# Altium PCB MED_BOX_v0.2.PcbDoc
Units mm, origin at the board's own origin, x right, y up, seen from the top; angles counter-clockwise.
Board outline 74.27 x 27.94 mm, 2 copper layers (Top Layer, Bottom Layer); 54 components, 50 nets, 201 pads, 140 vias.
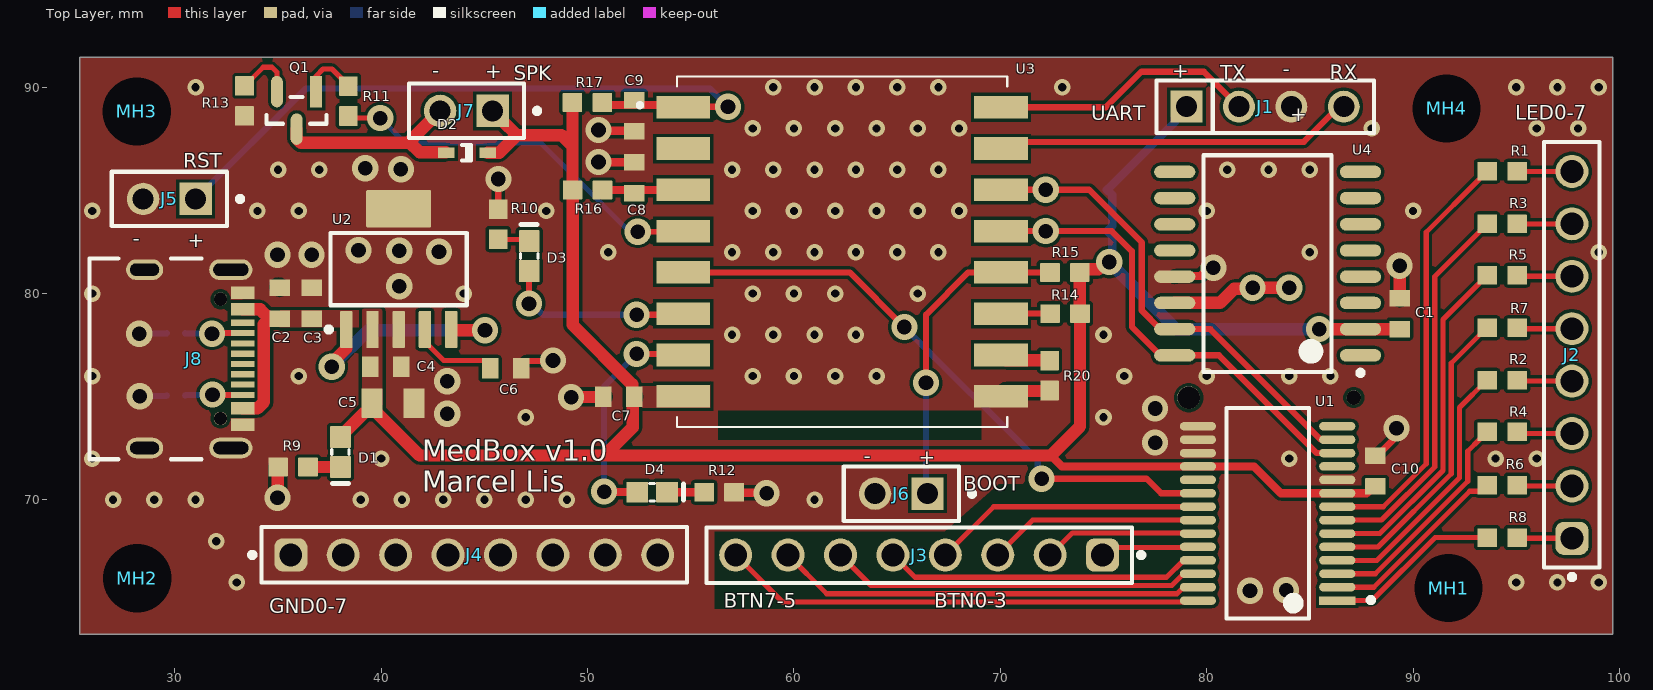
[diagram p0: Top Layer view]
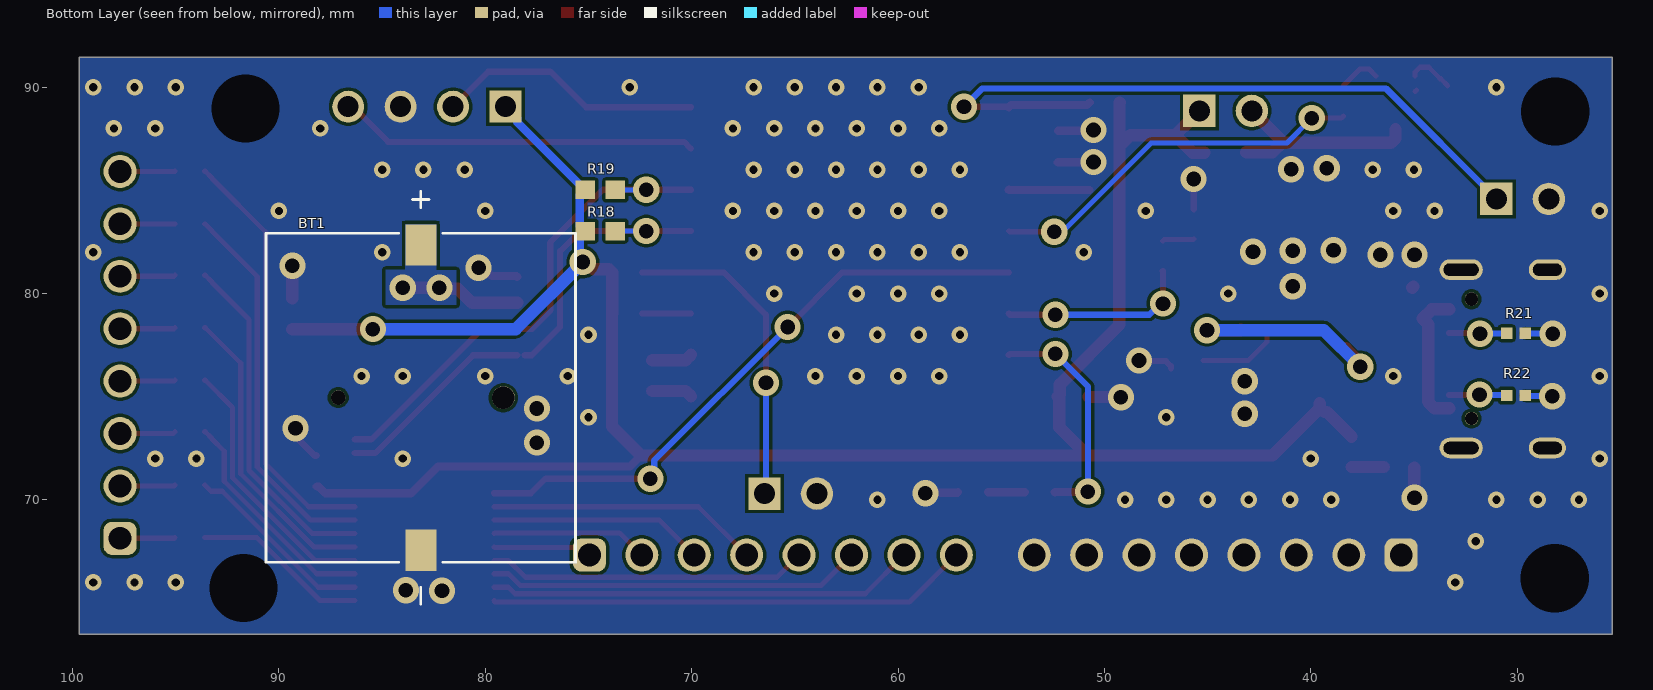
[diagram p1: Bottom Layer view, seen from below]
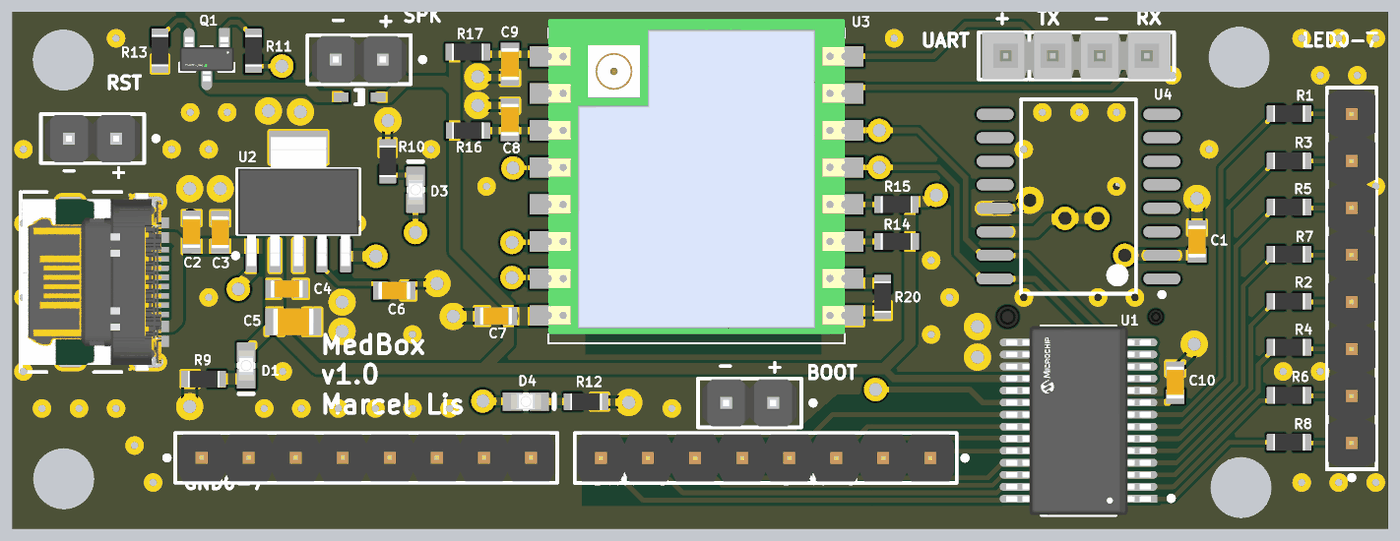
[diagram p2: 3D render of the assembled board from above, using the file's embedded part models]
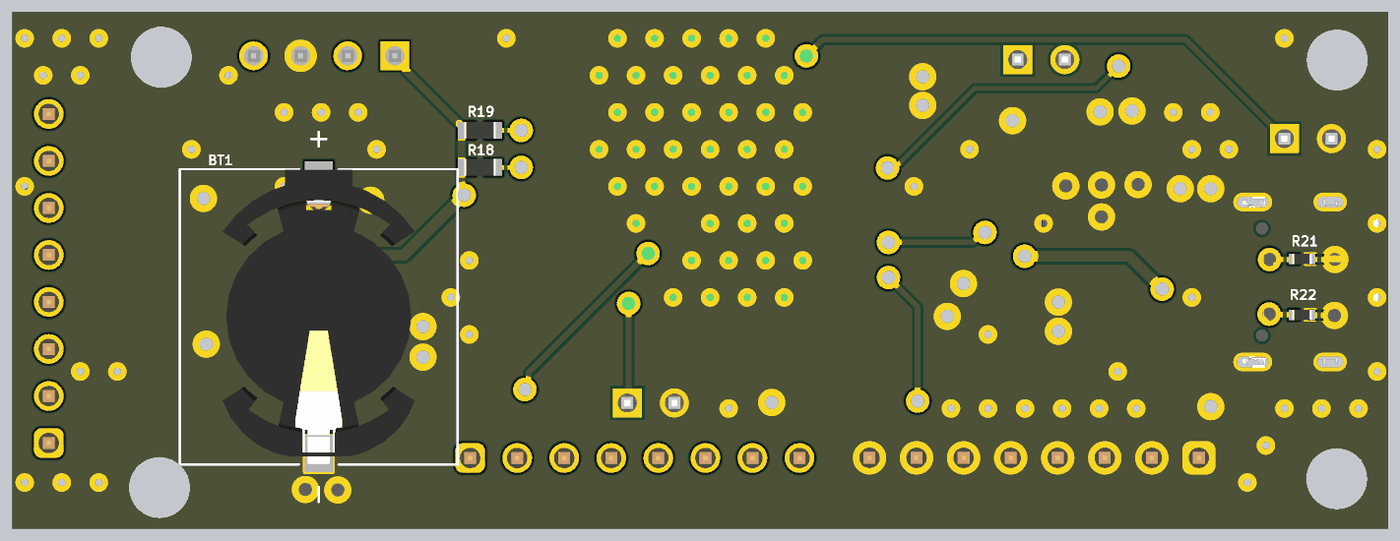
[diagram p3: 3D render of the assembled board from below, using the file's embedded part models]

## Layer stack, top to bottom
Top Solder: solder mask 0.0102, Solder Resist, Dk 3.5
Top Layer: signal copper 0.0356
Dielectric 1: dielectric 0.32, FR-4, Dk 4.8
Bottom Layer: signal copper 0.0356
Bottom Solder: solder mask 0.0102, Solder Resist, Dk 3.5

## Board outline
25.4,63.499 99.668,63.499 99.668,91.439 99.667,91.439 25.4,91.439

## Design rules (kind name [scope] priority, off if disabled: settings)
Clearance [All] p1: gap=0.15 ignorepadtopadclearanceinfootprint=FALSE
PlaneConnect [All] p1: planeconnectstyle=Direct reliefexpansion=0.508 reliefentries=4 reliefconductorwidth=0.254 reliefairgap=0.254
PolygonConnect [All] p1: connectstyle=Direct reliefconductorwidth=0.254 reliefentries=4 polygonreliefangle="90 Angle" airgapwidth=0.254
RoutingVias [All] p1: holewidth=0.3 width=0.6 viastyle="Through Hole" minholewidth=0.3 minwidth=0.6 maxholewidth=0.3 maxwidth=0.6
SolderMaskExpansion [All] p1: expansion=0.102 istentingtop=FALSE
SupplyNets "Schematic Supply Nets_1" [InNet('VCC')] p1: voltage=0.000
SupplyNets "Schematic Supply Nets_2" [InNet('GND')] p2: voltage=0.000
SupplyNets "Schematic Supply Nets" [InNet('+V_USB')] p3: voltage=0.000
Width [All] p1: maxlimit=0.8 minlimit=0.2 preferedwidth=0.25 minimp=50.000000 maximp=50.000000 favimp=50.000000
29 further rules are at their usual default settings.

## Classes and differential pairs
component class USB: J8 R21 R22
component class RTC: BT1 C10 U4
component class MED_BOX: J1 J2 J3 J4 MH1 MH2 MH3 MH4
component class Designator: C7 C8 C9 D2 D3 D4 J5 J6 J7 Q1 R10 R11 R12 R13 R14 R15 R16 R17 R18 R19 R20 U3

## Components (designator, comment, footprint, x,y, rotation, side; value= is the part's Value field where it differs from the comment)
BT1 "1072" BAT_1072 83.128,74.955 r270 bottom
C1 "100n" C0603 89.353,79.025 r270 top
C2 "1u" C0603 35.076,79.536 r270 top
C3 "100n" C0603 36.625,79.525 r270 top
C4 "100n" C0603 40.22,76.459 r180 top
C5 "10u" C0805 40.57,74.684 r180 top
C6 "10n" C0603 46.025,76.375 r180 top
C7 "100n" C0603 51.51,75 r0 top
C8 "100n" C0603 52.26,85.6 r270 top
C9 "100n" C0603 52.265,88.61 r90 top
C10 "100n" C0603 88.175,71.4 r270 top
D1 "LED" LED0603 38.025,72.32 r90 top
D2 "1N4148WT" FAIR-SOD-523F-2_V 44.15,86.825 r180 top
D3 "LED" LED0603 47.169,81.817 r270 top
D4 "LED" LED0603 53.125,70.375 r180 top
J1 "GoldPin 4x1" SMTC-TSW-104-08-X-S 79.024,89.055 r0 top
J2 "61300811121" 61300811121 97.7,77.025 r90 top
J3 "61300811121" 61300811121 66.065,67.325 r180 top
J4 "61300811121" 61300811121 44.507,67.333 r0 top
J5 "M20-9990246" FP-M20-9990246-MFG 29.731,84.583 r180 top
J6 "M20-9990246" FP-M20-9990246-MFG 65.2,70.3 r180 top
J7 "M20-9990246" FP-M20-9990246-MFG 44.125,88.85 r180 top
J8 "USB4105-GF-A" FP-USB4105-GF-A-MFG 29.695,76.834 r270 top
MH1 "M3 Mounting Hole" "Copy of M4 Mounting Hole" 91.725,65.725 r0 top
MH2 "M3 Mounting Hole" "Copy of M4 Mounting Hole" 28.175,66.2 r0 top
MH3 "M3 Mounting Hole" "Copy of M4 Mounting Hole" 28.15,88.825 r0 top
MH4 "M3 Mounting Hole" "Copy of M4 Mounting Hole" 91.625,88.975 r0 top
Q1 "BSS138" FP-318-08-IPC_B 35.895,88.875 r270 top
R1 "330R" R0603 94.318,85.928 r0 top
R2 "330R" R0603 94.318,75.793 r0 top
R3 "330R" R0603 94.318,83.372 r0 top
R4 "330R" R0603 94.318,73.301 r0 top
R5 "330R" R0603 94.318,80.887 r0 top
R6 "330R" R0603 94.318,70.716 r0 top
R7 "330R" R0603 94.318,78.344 r0 top
R8 "330R" R0603 94.318,68.174 r0 top
R9 "1k" R0603 35.725,71.595 r0 top
R10 "1k" R0603 45.665,83.361 r90 top
R11 "1k" R0603 38.408,89.326 r270 top
R12 "1k" R0603 56.37,70.371 r0 top
R13 "10k" R0603 33.371,89.335 r90 top
R14 "10k" R0603 73.135,79.025 r0 top
R15 "10k" R0603 73.13,81.02 r0 top
R16 "10k" R0603 49.997,85.016 r180 top
R17 "10k" R0603 49.989,89.256 r180 top
R18 "4k7" R0603 74.425,83.025 r0 bottom
R19 "4k7" R0603 74.425,85.025 r0 bottom
R20 "10k" R0603 72.385,76.025 r90 top
R21 "5k1" R0402 30.05,78.075 r180 bottom
R22 "5k1" R0402 30.05,75.056 r180 bottom
U1 "MCP23017T-E/SS" FP-C04-073-IPC_C 82.953,69.344 r180 top
U2 "TPS73718DCQR" DCQ0006A_L 40.845,81.184 r90 top
U3 "ESP8266_ESP-07" ESP8266ESP07 62.335,82.025 r0 top
U4 "DS3231SN#" W16#H2_L 82.953,81.45 r180 top

## Footprints (in the part's own frame and the unit in brackets; to place one, negate y for a bottom-side part, rotate by r counter-clockwise, add the part's x,y. Pads: shape width x height; smd on the part's side, far side on the other; paste and mask are expansions set on the pad)
61300811121 [mm] "Pin Header, pitch 2.54 mm, THT, Vertical, single row, 8p"
  rrect50% 1.6x1.6 hole 1.1: 1(-8.89,0)
  round 1.6 hole 1.1: 2(-6.35,0) 3(-3.81,0) 4(-1.27,0) 5(1.27,0) 6(3.81,0) 7(6.35,0) 8(8.89,0)
  silkscreen extent -10.88,-1.35 10.31,1.35, body extent -10.16,-1.27 10.16,1.27, height 8.57
BAT_1072 [mm]
  rect 2x1.5 smd: N(7.4,0) P(-7.4,0)
  round 0.7 hole 0.7 unplated: ""(0,-4)
  round 1.1 hole 1.1 unplated: ""(0,4)
  silkscreen extent -10,-7.5 10,7.5, body extent -7.95,-5.2 7.95,5.2, height 3.75
C0603 [mm] "Generic 0603 SMD Ceramic Capacitor Footprint"
  rrect5% 0.8x1 smd: 1(-0.75,0) 2(0.75,0)
  body extent -0.87,-0.48 0.87,0.48, height 0.95
C0805 [mm] "Generic 0805 SMD Ceramic Capacitor Footprint"
  rrect5% 1x1.45 smd: 1(-1.016,0) 2(1.016,0)
  body extent -1.1,-0.72 1.1,0.72, height 1.45
"Copy of M4 Mounting Hole" [mm]
  round 0 hole 3.3 unplated mask+0.051: 1(0,0)
DCQ0006A_L [mm] "SOT223, 6-Leads, Body 6.55x3.55mm, Pitch 1.27mm, IPC High Density"
  rrect17% 1.8x0.6 smd: 1(-2.925,2.54) 2(-2.925,1.27) 3(-2.925,0) 4(-2.925,-1.27) 5(-2.925,-2.54)
  rrect6% 1.8x3.15 smd: 6(2.925,0)
  silkscreen extent -3.05,-3.3 1.75,3.51, body extent -3.48,-3.25 3.48,3.25, height 1.64
ESP8266ESP07 [mm]
  rect 2.6x1.1 smd: 1(-7.7,7) 2(-7.7,5) 3(-7.7,3) 4(-7.7,1) 5(-7.7,-1) 6(-7.7,-3) 7(-7.7,-5) 8(-7.7,-7) 9(7.7,-7) 10(7.7,-5) 11(7.7,-3) 12(7.7,-1) 13(7.7,1) 14(7.7,3) 15(7.7,5) 16(7.7,7)
  silkscreen extent -9.9,-8.5 8,8.5, body extent -8,-8 8,9, height 2.21
FAIR-SOD-523F-2_V [mm] "SMD, 2-Leads, Body 1.2x0.8mm, Height 0.7mm"
  rect 0.8x0.5 smd: 1(-1,0) 2(1,0)
  silkscreen extent -0.2,-0.38 0.24,0.38, body extent -0.6,-0.4 0.6,0.4, height 0.71
FP-318-08-IPC_B [mm]
  rect 1.524x0.578 smd paste+0 mask+0: 1(-0.91,0.95)
  rrect100% 1.524x0.578 smd paste+0 mask+0: 2(-0.91,-0.95) 3(0.91,0)
  silkscreen extent -0.65,-1.45 0.65,1.45, body extent -1.92,-1.7 1.92,1.7, height 0.25
FP-C04-073-IPC_C [mm]
  rect 1.753x0.415 smd paste+0 mask+0: 1(-3.375,4.225)
  rrect100% 1.753x0.415 smd paste+0 mask+0: 2(-3.375,3.575) 3(-3.375,2.925) 4(-3.375,2.275) 5(-3.375,1.625) 6(-3.375,0.975) 7(-3.375,0.325) 8(-3.375,-0.325) 9(-3.375,-0.975) 10(-3.375,-1.625) 11(-3.375,-2.275) 12(-3.375,-2.925) 13(-3.375,-3.575) 14(-3.375,-4.225) 15(3.375,-4.225) 16(3.375,-3.575) 17(3.375,-2.925) 18(3.375,-2.275) 19(3.375,-1.625) 20(3.375,-0.975) 21(3.375,-0.325) 22(3.375,0.325) 23(3.375,0.975) 24(3.375,1.625) 25(3.375,2.275) 26(3.375,2.925) 27(3.375,3.575) 28(3.375,4.225)
  silkscreen extent -5.13,-5.1 2,5.1, body extent -4.35,-5.2 4.35,5.2, height 0.25
FP-M20-9990246-MFG [mm]
  rect 1.57x1.57 hole 1.02 paste-2539.97 mask+0: 1(-1.27,0)
  round 1.57 hole 1.02 paste-2539.97 mask+0: 2(1.27,0)
  silkscreen extent -3.55,-1.32 2.79,1.32, body extent -2.89,-1.42 2.89,1.42, height 0.25
FP-USB4105-GF-A-MFG [mm]
  rrect100% 1x2.1 hole 1.7 slot 0.6 at 0 deg paste-2539.97 mask+0: 1(-4.32,3.015) 2(4.32,3.015)
  rrect100% 1x1.8 hole 1.4 slot 0.6 at 0 deg paste-2539.97 mask+0: 3(-4.32,-1.165) 4(4.32,-1.165)
  rect 0.6x1.15 smd paste+0 mask+0: A1-B12(-3.2,3.59) A4-B9(-2.4,3.59) B1-A12(3.2,3.59) B4-A9(2.4,3.59)
  rect 0.3x1.15 smd paste+0 mask+0: A5(-1.25,3.59) A6(-0.25,3.59) A7(0.25,3.59) A8(1.25,3.59) B5(1.75,3.59) B6(0.75,3.59) B7(-0.75,3.59) B8(-1.75,3.59)
  round 0.65 hole 0.65 unplated paste-2539.97 mask+0: ""(-2.89,2.515) ""(2.89,2.515)
  silkscreen extent -4.86,-3.84 4.86,1.59, body extent -4.96,-3.94 4.96,4.27, height 0.25
LED0603 [mm] "0603 LED footprint"
  rrect5% 1.05x1 smd: A(0.725,0) K(-0.725,0)
  silkscreen extent -1.52,-0.42 0.11,0.43, body extent -0.81,-0.41 0.81,0.41, height 0.95
R0402 [mm] "Generic 0402 Resistor Footprint"
  rrect5% 0.55x0.55 smd: 1(-0.45,0) 2(0.45,0)
  body extent -0.53,-0.28 0.53,0.28, height 0.37
R0603 [mm] "Generic 0603 Resistor Footprint"
  rrect5% 0.95x0.9 smd: 1(-0.725,0) 2(0.725,0)
  body extent -0.85,-0.45 0.85,0.45, height 0.55
SMTC-TSW-104-08-X-S [mm] ".025 SQ Post Terminal Strip Assembly, 1x4 Pins, Vertical, 2.54mm Pitch, Male"
  rect 1.55x1.55 hole 1.02: 1(0,0)
  round 1.55 hole 1.02: 2(2.54,0) 3(5.08,0) 4(7.62,0)
  silkscreen extent -1.46,-1.27 9.08,1.27, body extent -1.27,-1.27 8.89,1.27, height 8.38
W16#H2_L [mm] "SOIC, 16-Leads, Body 10.3x7.5mm, Pitch 1.27mm, IPC High Density"
  oval 2x0.6 smd: 1(-4.5,4.445) 2(-4.5,3.175) 3(-4.5,1.905) 4(-4.5,0.635) 5(-4.5,-0.635) 6(-4.5,-1.905) 7(-4.5,-3.175) 8(-4.5,-4.445) 9(4.5,-4.445) 10(4.5,-3.175) 11(4.5,-1.905) 12(4.5,-0.635) 13(4.5,0.635) 14(4.5,1.905) 15(4.5,3.175) 16(4.5,4.445)
  silkscreen extent -4.62,-5.25 3.1,5.42, body extent -3.8,-5.25 3.8,5.25, height 2.65

## Part data
BT1: "Battery Holder CR1220/1225", Package="NON STANDARD-2 Keystone", Check_prices=https://www.snapeda.com/parts/1072/Keystone/view-part/?ref=eda, MF="Keystone Electronics", MP=1072, SnapEDA_Link=https://www.snapeda.com/parts/1072/Keystone/view-part/?ref=snap
C1 C2 C3 C4 C6 C7 C8 C9 C10: library part CMP-00024-8, "Generic 0603 SMD Ceramic Capacitor"
C5: library part CMP-00025-5, "Generic 0805 SMD Ceramic Capacitor"
D1 D3 D4: library part CMP-00036-7, "0603 LED"
D2: library part CMP-0881-00001-1, "High Conductance Fast Switching Diode, 75 V, -55 to 150 degC, 2-Pin SOD523F, RoHS", Manufacturer="Fairchild Semiconductor", Temperature Range="-55 to 150 degC", BVR (IR="5 uA)=75 V Min.", CO="4 pF Max.", ComponentLink1Description="Manufacturer URL", ComponentLink1URL=http://www.fairchildsemi.com/, ComponentLink2Description=Datasheet, ComponentLink2URL=http://www.fairchildsemi.com/ds/1N/1N4148WT.pdf, DatasheetVersion="Rev. A2", IR (VR="75 V)=5 uA Max.", Mounting Technology="Surface Mount", PackageDescription="2-Pin Surface Mount Device, Body 1.2 x 0.8 mm, Height 0.7 mm", PackageReference=SOD-523F-2, PartNumber=1N4148WT, RoHS=TRUE, VF="1 V Max."
J1: library part CMP-00067-4, "TSW - Samtec 2.54mm Pin Header 13.46mm Overall Pin Length 5.08mm Tail (08) (mcv)(TO22)", Manufacturer=Molex
J2 J3 J4: library part CMP-1502-01076-4, "THT Vertical Pin Header WR-PHD, Pitch 2.54 mm, Single Row, 8 pins", Color=Black, Contact Resistance=20mΩ, Current Rating=3A, Max Operating Temperature=105°C, Min Operating Temperature=-40°C, Operating Supply Voltage=250V, Connector Type="Male Pin", Contact Material=Gold, Contact Mating Length=5.9944mm, Contact Plating=Gold, Gender=Male, Height=8.54mm, Lead Pitch=2.54mm, Mount="Through Hole", Number Of Contacts=8, Number of Pins=8, Number of Positions=8, Number Of Rows=1, Orientation=Vertical, Packaging=Bulk, Pitch=2.54mm, RoHS=Compliant, Termination=Solder, Voltage Rating=250V
J5 J6 J7: library part CMP-15831-000009-1, "CONN HEADER VERT 2POS 2.54MM", Current Rating=3A, Manufacturer=Harwin, Temperature="-40°C to +105°C", Temperature Range High=+105°C, Temperature Range Low=-40°C, Automotive=No, Category=Conn, ComponentLink2Description=Datasheet, ComponentLink2URL=https://cdn.harwin.com/pdfs/M20-999.pdf, Conn Gender=Male, Conn Orientation=Vertical, Contact Material=Tin,Nickel, Device Class L1=Connectors, Device Class L2="Headers and Wire Housings", Device Class L3=unset, Digikey Description="CONN HEADER VERT 2POS 2.54MM", Height=8.99mm, Lead Free=Yes, Manufacturer Part Number=M20-9990246, Mouser Description="2.54mm (0.1\") Pitch SIL Vertical PC Tail Pin Header, 6.1mm mating pin height, tin, 2 contacts", Number Of Contacts=2, Number Of Rows=1, Octopart=https://octopart.com/m20-9990246-harwin-2590635, Package=M20-9990246, Pitch=2.54mm, RoHS=TRUE
J8: library part CONN-00045-1, "USB Connector, 24 Contact(s), Female, Right Angle, Solder Terminal, Locking, Receptacle", Manufacturer=GCT, Manufacturer PN=USB4105-GF-A, Supplier=Mouser, Supplier PN=640-USB4105-GF-A
MH1 MH2 MH3 MH4: library part CONN-00002-1, Manufacturer=Molex
Q1: library part CMP-07173-000101-1, "MOSFET N-CH 50V 220MA SOT-23", Case/Package=SOT-23, Continuous Drain Current (ID)=220mA, Drain to Source Breakdown Voltage=50V, Drain to Source Resistance=3.5R, Gate to Source Voltage (Vgs)=20V, Input Capacitance=27pF, Max Operating Temperature=150°C, Max Power Dissipation=360mW, Min Operating Temperature=-55°C, On-State Resistance=6R, Package Quantity=1, Threshold Voltage=1.3V, Contact Plating=Tin, Current Rating=220mA, Drain to Source Voltage (Vdss)=50V, Dual Supply Voltage=50V, Element Configuration=Single, Fall Time=9ns, Height=0.93mm, Lead Free="Lead Free", Length=2.92mm, Mount="Surface Mount", Nominal Vgs=1.3V, Number of Elements=1, Number of Pins=3, Packaging="Tape and Reel", Power Dissipation=360mW, Radiation Hardening=No, Rds On Max=3.5R, REACH SVHC="No SVHC", Rise Time=9ns, Termination=SMD/SMT, Turn-Off Delay Time=20ns, Turn-On Delay Time=2.5ns, Voltage Rating (DC)=50V, Weight=0.03g, Width=1.3mm
R1 R2 R3 R4 R5 R6 R7 R8 R9 R10 R11 R12 R13 R14 R15 R16 R17 R18 R19 R20: library part CMP-00017-10, "Generic 0603 SMD Resistor"
R21 R22: library part CMP-00016-10, "Generic 0402 SMD Resistor"
U1: library part CMP-0186-00065-3, "IC I/O EXPANDER 16BIT I2C 28SSOP", Case/Package=SSOP, Frequency=1.7MHz, Max Frequency=10MHz, Max Operating Temperature=125°C, Min Operating Temperature=-40°C, Nominal Supply Current=1mA, Operating Supply Voltage=5.5V, Output Current=25mA, Package Quantity=2100, Power Dissipation=700mW, Interface=I2C, Lead Free="Lead Free", Mount="Surface Mount", Number of Bits=16, Number of Channels=1, Number of I/Os=16, Number of Pins=28, Packaging="Tape and Reel"
U2: library part CMP-0395-00291-2, "Single Output LDO, 1 A, Fixed 1.8 V Output, 2.2 to 5.5 V Input, with Reverse Current Protection, 6-pin SOT-223 (DCQ), -40 to 125 degC, Green (RoHS & no Sb/Br)", Manufacturer="Texas Instruments", Rating=Catalog, Accuracy(%)=3, ComponentLink1Description="Manufacturer URL", ComponentLink1URL=http://www.ti.com/, ComponentLink2Description=Datasheet, ComponentLink2URL=http://www.ti.com/general/docs/lit/getliterature.tsp?genericPartNumber=TPS73718&fileType=pdf, ComponentLink3Description="Package Specification", ComponentLink3URL=http://www.ti.com/litv/pdf/mpds098c, DatasheetVersion=SBVS067O, Eco-Plan="Green (RoHS & no Sb/Br)", Fixed Output Options(V)=1.8, Iout(Max)(A)=1, Iq(Typ)(mA)=0.3, Mounting Technology="Surface Mount", PackageDescription="6-Pin Plastic Small Outline, Body 3.5 x 6.5 mm, Pitch 1.27 mm", PackageReference=DCQ0006A, PackageVersion=4202109/D, PartNumber=TPS73718DCQR, SubFamily="Single Channel LDO", Vdo(Typ)(mV)=130, Vin(Max)(V)=5.5, Vin(Min)(V)=2.2, Vout Adj(Max)(V)=1.8, Vout Adj(Min)(V)=1.8
U3: "Connector", Manufacturer_Name=Ai-Thinker, Manufacturer_Part_Number="ESP8266 ESP-07", Datasheet Link=http://datasheet.octopart.com/ESP-07S-RF-Solutions-datasheet-104506015.pdf, Height=3mm
U4: library part CMP-0254-00293-2, "Extremely Accurate I2C-Integrated Real-Time Clock/TCXO/Crystal, 16-Pin SO, -40 to 85 degC, RoHS Qualified", Code_IPC=SOIC127P1030-16, Code_JEDEC=MS-013-AA, ComponentLink1Description="Manufacturer URL", ComponentLink1URL=http://www.maxim-ic.com, ComponentLink2Description=Datasheet, ComponentLink2URL=http://datasheets.maxim-ic.com/en/ds/DS3231.pdf, ComponentLink3Description="Package Specification", ComponentLink3URL=http://pdfserv.maxim-ic.com/package_dwgs/21-0042.PDF, DatasheetVersion="Rev 8, Jul-2010", PackageDescription="16-Pin Small-Outline IC, Wide (0.3in), 1.27 mm Pitch, SOIC (W), RoHS Qualified", PackageReference=W16#H2, PackageVersion="revD, 2010"

## Via types
v1: diameter 0.8, hole 0.4, Top Layer to Bottom Layer, 94 vias
v2: diameter 1.27, hole 0.711, Top Layer to Bottom Layer, 46 vias

## Nets (pads, with @x,y where several pads share a name; then routed paths per layer and width w, separated by ;. In a path a pad name is that pad's centre, name@x,y a point inside that pad or via, vN(x,y) a via of type N, cw(c..) or ccw(c..) an arc to the next point about the centre after c; other vN are vias at no path point)
+V_USB: C2.2 C3.2 J8.A4-B9 J8.B4-A9 U2.1 U2.5 | length 17.8
  Top Layer w0.6: J8.B4-A9 33.996,74.434 34.31,74.747 34.31,78.519 34.576,78.786 34.128,79.234 J8.A4-B9 ; v2(37.6,76.45) 37.6,76.631 38.305,77.336 38.305,77.359 ; U2.5 43.385,78.225 v2(45.025,78.225)
  Bottom Layer w0.6: v2(37.6,76.45) 39.375,78.225 v2(45.025,78.225)
A0: R1.1 U1.8 | length 20.6
  Top Layer w0.25: U1.8 88.559,69.669 90.637,71.747 90.637,82.972 93.243,85.578 93.243,85.603 93.568,85.928 R1.1
A1: R3.1 U1.7 | length 18.6
  Top Layer w0.25: U1.7 88.475,69.019 91.05,71.594 91.05,80.829 93.243,83.022 93.243,83.047 93.568,83.372 R3.1
A2: R5.1 U1.6 | length 16.8
  Top Layer w0.25: U1.6 88.39,68.369 91.45,71.428 91.45,78.743 93.243,80.537 93.243,80.562 93.568,80.887 R5.1
A3: R7.1 U1.5 | length 14.8
  Top Layer w0.25: U1.5 88.306,67.719 91.85,71.263 91.85,76.625 93.568,78.344 R7.1
A4: R2.1 U1.4 | length 12.9
  Top Layer w0.25: U1.4 88.244,67.069 92.25,71.075 92.25,74.475 93.568,75.793 R2.1
A5: R4.1 U1.3 | length 11
  Top Layer w0.25: U1.3 88.169,66.419 92.65,70.9 92.65,72.358 93.243,72.951 93.243,72.976 93.568,73.301 R4.1
A6: R6.1 U1.2 | length 9.3
  Top Layer w0.25: U1.2 88.094,65.769 92.746,70.421 93.298,70.421 R6.1
A7: R8.1 U1.1 | length 8.5
  Top Layer w0.25: U1.1 88.019,65.119 91.074,68.174 R8.1
BOOT: J6.1 R15.1 U3.12 | length 15.6
  Top Layer w0.3: v2(66.4,75.675) 66.4,78.975 68.45,81.025 U3.12 70.04,81.02 R15.1
  Bottom Layer w0.3: v2(66.4,75.675) 66.4,70.37 J6.1
BUTTON_B0: J3.4 U1.21 | length 13.2
  Top Layer w0.25: J3.4 69.679,69.669 U1.21
BUTTON_B1: J3.3 U1.22 | length 10.4
  Top Layer w0.25: J3.3 71.569,69.019 U1.22
BUTTON_B2: J3.2 U1.23 | length 7.6
  Top Layer w0.25: J3.2 73.49,68.4 79.546,68.4 U1.23
BUTTON_B3: J3.1 U1.24 | length 4.8
  Top Layer w0.25: J3.1 75.317,67.687 79.546,67.687 U1.24
BUTTON_B4: J3.5 U1.25 | length 15.6
  Top Layer w0.25: J3.5 65.87,66.25 78.057,66.25 78.876,67.069 U1.25
BUTTON_B5: J3.6 U1.26 | length 18.2
  Top Layer w0.25: J3.6 63.73,65.85 78.307,65.85 78.876,66.419 U1.26
BUTTON_B6: J3.7 U1.27 | length 20.8
  Top Layer w0.25: J3.7 61.59,65.45 78.557,65.45 78.876,65.769 U1.27
BUTTON_B7: J3.8 U1.28 | length 23.4
  Top Layer w0.25: J3.8 59.45,65.05 U1.28@79.546,65.05 ; U1.28@79.546,65.087 U1.28
BUZZER: R11.2 U3.4 | length 18.6
  Top Layer w0.25: R11.2 38.51,88.5 v2(39.95,88.5) ; v2(52.425,82.994) 54.604,82.994 U3.4
  Bottom Layer w0.25: v2(39.95,88.5) 41.15,87.3 47.725,87.3 51.835,83.19 52.23,83.19 v2(52.425,82.994)
EN: C8.2 R16.1 U3.3 | length 3.9
  Top Layer w0.4: R16.1 50.727,85.021 54.631,85.021 U3.3
GND: BT1.N C1.1 C2.1 C3.1 C4.1 C5.1 C6.1 C7.1 C8.1 C9.1 C10.1 J1.3 J4.1 J4.2 J4.3 J4.4 J4.5 J4.6 J4.7 J4.8 J5.2 J6.2 J8.1 J8.2 J8.3 J8.4 J8.A1-B12 J8.B1-A12 MH1.1 MH2.1 MH3.1 MH4.1 R9.1 R10.2 R12.2 R13.1 R20.1 R21.2 R22.2 U1.10 U1.15 U1.16 U1.17 U2.3 U2.6 U3.9 U4.13 | length 21.6
  Top Layer w0.3: R9.1@34.975,71.57 R9.1 ; R10.2 45.67,84.092 45.67,85.545 v2(45.675,85.55) ; C6.1 46.775,76.475 47.025,76.725 48.3,76.725 v2(48.325,76.75) ; v2(50.525,87.925) v2@50.558,87.892 ; C9.1@52.232,87.892 C9.1 ; v2(89.35,81.35) v2@89.353,81.347
  Top Layer w0.34: C10.1 88.275,72.15 89.022,72.897 89.022,73.297 v2(89.2,73.475)
  Top Layer w0.4: v2(50.525,86.375) 50.538,86.362 52.248,86.362 C8.1 ; v2@50.558,87.892 C9.1@52.232,87.892 ; R12.2 57.119,70.348 58.652,70.348 v2(58.675,70.325) ; U4.13 78.491,80.853 79.693,80.853 80.09,81.25 v2(80.325,81.25)
  Top Layer w0.6: v2(34.975,70.1) R9.1@34.975,71.57 ; v2(34.975,81.875) v2@35.026,81.824 ; C2.1@35.026,80.336 C2.1 ; v2(49.2,74.975) 49.212,74.988 50.748,74.988 C7.1 ; U3.9 70.285,75.275 71.91,75.275 ; C1.1 v2@89.353,81.347
  Bottom Layer w0.3: v2(28.275,78.05) 28.287,78.062 29.587,78.062 R21.2 ; v2(28.3,75.025) 28.316,75.041 29.584,75.041 R22.2
  other v1: 33,66 95,66 97,66 99,66 32,68 27,70 29,70 31,70 39,70 41,70 43,70 45,70 47,70 49,70 61,70 26,72 40,72 84,72 94,72 96,72 47,74 75,74 26,76 36,76 58,76 60,76 62,76 64,76 76,76 80,76 84,76 86,76 57,78 59,78 61,78 63,78 75,78 26,80 44,80 58,80 60,80 62,80 66,80 51,82 57,82 59,82 61,82 63,82 65,82 67,82 85,82 99,82 26,84 34,84 36,84 48,84 58,84 60,84 62,84 64,84 66,84 68,84 80,84 90,84 35,86 37,86 57,86 59,86 61,86 63,86 65,86 67,86 81,86 83,86 85,86 58,88 60,88 62,88 64,88 66,88 68,88 88,88 96,88 98,88 31,90 59,90 61,90 63,90 65,90 67,90 73,90 95,90 97,90 99,90
  other v2: 82.1,65.6 83.85,65.625 77.5,72.775 43.2,74.175 77.5,74.425 43.2,75.75 40.875,80.35 36.625,81.875 42.8,82.025 40.875,82.075 38.9,82.1 40.95,86.025 39.225,86.075
GPIO2: R14.1 U3.11 | length 2.4
  Top Layer w0.3: U3.11 R14.1
GPIO12: D3.A U3.6 | length 9.3
  Top Layer w0.3: v2(47.163,79.511) 47.163,81.086 D3.A ; v2(52.375,78.975) 54.585,78.975 U3.6
  Bottom Layer w0.3: v2(47.163,79.511) 47.288,79.511 47.824,78.975 v2(52.375,78.975)
GPIO13: D4.A U3.7 | length 11.2
  Top Layer w0.3: v2(52.375,77.075) 54.585,77.075 U3.7
  Top Layer w0.4: v2(50.8,70.4) 50.812,70.387 52.387,70.387 D4.A
  Bottom Layer w0.3: v2(50.8,70.4) 50.8,75.5 v2(52.375,77.075)
GPIO15: R20.2 U3.10 | length 2
  Top Layer w0.6: U3.10 70.285,76.775 71.91,76.775
LED_A0: J2.8 R1.2 | length 2.7
  Top Layer w0.25: R1.2 95.056,85.915 J2.8
LED_A1: J2.7 R3.2 | length 2.7
  Top Layer w0.25: R3.2 95.046,83.375 J2.7
LED_A2: J2.6 R5.2 | length 2.7
  Top Layer w0.25: R5.2 95.095,80.835 J2.6
LED_A3: J2.5 R7.2 | length 2.7
  Top Layer w0.25: R7.2 95.092,78.295 J2.5
LED_A4: J2.4 R2.2 | length 2.7
  Top Layer w0.25: R2.2 95.082,75.755 J2.4
LED_A5: J2.3 R4.2 | length 2.7
  Top Layer w0.25: R4.2 95.129,73.215 J2.3
LED_A6: J2.2 R6.2 | length 2.7
  Top Layer w0.25: R6.2 95.084,70.675 J2.2
LED_A7: J2.1 R8.2 | length 2.7
  Top Layer w0.25: R8.2 95.077,68.141 97.694,68.141 J2.1
NetC6_2: C6.2 U2.4 | length 4.1
  Top Layer w0.25: U2.4 42.115,77.659 43.023,76.75 C6.2@45.225,76.75
NetD1_K: D1.K R9.2 | length 1.6
  Top Layer w0.6: R9.2 D1.K
NetD2_2: D2.2 J7.2 Q1.3 | length 10
  Top Layer w0.6: Q1.3 35.895,87.514 36.108,87.3 41.4,87.3 41.85,86.85 D2.2@43.125,86.85 ; 41.4,87.395 J7.2
NetD3_K: D3.K R10.1 | length 1.5
  Top Layer w0.25: R10.1 45.688,82.613 47.099,82.613 D3.K
NetD4_K: D4.K R12.1 | length 1.8
  Top Layer w0.4: D4.K 53.852,70.373 55.644,70.373 R12.1
NetJ8_A5: J8.A5 R21.1 | length 2.8
  Top Layer w0.3: v2(31.8,78.05) 31.834,78.084 J8.A5
  Bottom Layer w0.3: R21.1 30.512,78.062 31.788,78.062 v2(31.8,78.05)
NetJ8_B5: J8.B5 R22.1 | length 2.8
  Top Layer w0.3: v2(31.825,75.1) 31.841,75.084 J8.B5
  Bottom Layer w0.3: R22.1 30.522,75.078 31.803,75.078 v2(31.825,75.1)
NetQ1_1: Q1.1 R11.1 | length 2.1
  Top Layer w0.25: 36.845,90.547 37.172,90.875 37.61,90.875 38.408,90.076 R11.1
NetQ1_2: Q1.2 R13.2 | length 2.3
  Top Layer w0.25: R13.2 33.371,90.085 33.696,90.41 33.721,90.41 34.277,90.966 34.7,90.966 34.945,90.721 34.945,90.547 ; Q1.2@34.882,89.848 Q1.2
NetU1_20: U1.20 U3.5 | length 29.8
  Top Layer w0.3: U3.5 62.7,81.025 v2(65.35,78.375) ; v2(72,71.025) 77.087,71.025 77.794,70.319 U1.20
  Bottom Layer w0.3: v2(65.35,78.375) 71.814,71.911 71.814,71.211 v2(72,71.025)
RST: C9.2 J5.1 R17.1 U3.1 | length 34.6
  Top Layer w0.3: U3.1 54.66,89.05 v2(56.8,89.05)
  Top Layer w0.4: R17.1 50.83,89.14 54.52,89.14 U3.1
  Bottom Layer w0.3: J5.1 36.352,89.935 55.915,89.935 v2(56.8,89.05)
SCL: R18.1 U1.12 U3.13 U4.16 | length 24
  Top Layer w0.3: U3.13 v2(72.2,83.025) 75.4,83.025 76.375,82.05 76.375,78.383 77.753,77.005 U4.16@78.103,77.005 ; U4.16 80.595,77.005 85.33,72.27 86.327,72.27 U1.12
  Bottom Layer w0.25: v2(72.2,83.025) R18.1
SDA: R19.1 U1.13 U3.14 U4.15 | length 24.7
  Top Layer w0.3: U3.14 v2(72.2,85.025) 74.3,85.025 76.85,82.475 76.85,79.178 77.753,78.275 U4.15 80.175,78.275 85.509,72.941 86.306,72.941 U1.13
  Bottom Layer w0.25: v2(72.2,85.025) R19.1
UART_RX: J1.4 U3.15 | length 17.5
  Top Layer w0.3: U3.15 70.36,87.35 84.7,87.35 86.405,89.055 J1.4
UART_TX: J1.2 U3.16 | length 12.9
  Top Layer w0.3: U3.16 75.116,89.025 76.841,90.75 79.869,90.75 J1.2
VBAT: BT1.P U4.14 | length 5.8
  Top Layer w0.6: U4.14 80.645,79.545 81.325,80.225 82.175,80.225 v2(82.225,80.275) v2(84,80.275)
VCC: C1.2 C4.2 C5.2 C7.2 C10.2 D1.A D2.1 J1.1 J7.1 R14.2 R15.2 R16.2 R17.2 R18.2 R19.2 U1.9 U1.18 U2.2 U3.8 U4.2 | length 114
  Top Layer w0.4: 72.45,72.15 72.981,71.619 U1.18 82.304,71.619 83.604,70.319 U1.9 87.744,70.319 88.075,70.65 C10.2
  Top Layer w0.6: D1.A 38.025,73.07 C5.2@39.214,74.259 ; C5.2@39.354,74.259 C5.2@39.554,74.459 ; C5.2 C5.2@39.554,74.459 ; D2.1 45.72,86.825 46.247,87.352 46.57,87.675 ; J7.1@45.395,88.844 45.401,88.844 45.88,88.365 45.88,88.359 46.564,87.675 46.57,87.675 ; R17.2 49.268,89.252 49.268,87.136 ; v2(75.275,81.525) 75.094,81.525 74.739,81.17 74.005,81.17 R15.2 73.858,81.018 73.858,79.027 R14.2 73.86,73.56 72.45,72.15 50.825,72.15 ; v2(85.45,78.275) U4.2 C1.2 ; C5.2@39.554,74.459 41.862,72.15 50.825,72.15 ; 46.57,87.675 48.729,87.675 49.268,87.136 ; 49.268,87.136 49.268,85.02 R16.2 49.272,78.488 52.16,75.6 52.16,75.1 C7.2 52.181,74.921 52.181,73.506 50.825,72.15
  Bottom Layer w0.4: R18.2 R18.2@75.175,83.025 ; R19.2 R19.2@75.175,85.025 ; v2(75.275,81.525) 75.425,81.675 75.425,82.775 R18.2@75.175,83.025 ; J1.1 78.449,88.48 78.449,88.299 R19.2@75.175,85.025 ; R18.2@75.175,83.025 75.425,83.275 75.425,84.775 R19.2@75.175,85.025
  Bottom Layer w0.6: v2(75.275,81.525) 78.525,78.275 v2(85.45,78.275)
pads on no net: BT1. J8. J8.A6 J8.A7 J8.A8 J8.B6 J8.B7 J8.B8 U1.11 U1.14 U1.19 U3.2 U4.1 U4.3 U4.4 U4.5 U4.6 U4.7 U4.8 U4.9 U4.10 U4.11 U4.12

## Polygon pours and split planes (outlines as drawn)
GND on Top Layer "GND_L01_P025" (solid, pour order 25): 25.375,91.439 99.643,91.439 99.643,63.499 25.375,63.499
GND on Top Layer "GND_L01_P021" (solid, pour order 21): 40.56,79.144 40.57,79.134 40.57,74.5 41.111,73.959 42.061,73.959 42.061,75.359 42.086,75.384 41.37,76.1 41.37,78.904 41.13,79.144
VCC on Top Layer "VCC_L01_P018" (solid, pour order 18): 55.935,75.575 55.86,75.5 51.88,75.5 51.88,74.54 51.86,74.52 51.905,74.475 55.935,74.475
+V_USB on Top Layer "+V_USB_L01_P007" (solid, pour order 7): 38.9,79.18 34.869,79.18 34.869,78.37 38.9,78.37
VCC on Top Layer "VCC_L01_P001" (solid, pour order 1): 39.945,73.955 ccw(c39.945,74.055) 40.045,74.055 40.045,79.13 ccw(c39.92,79.13) 39.92,79.255 39.17,79.255 ccw(c39.17,79.155) 39.07,79.155 39.07,74.055 ccw(c39.17,74.055) 39.17,73.955
GND on Bottom Layer "GND_L02_P023" (solid, pour order 23): 25.375,91.439 25.375,63.499 99.643,63.499 99.643,91.439 99.642,91.439
VBAT on Bottom Layer "VBAT_L02_P016" (solid, pour order 16): 81.4,81.125 81.4,79.45 84.825,79.45 84.825,81.15 83.875,81.15 83.875,83.352 83.878,83.355 82.378,83.355 82.378,81.128 82.375,81.125

## Other copper
Top Layer:
  pour cut-out: 56.325,72.925 69.075,72.925 69.075,74.325 56.325,74.325
  pour cut-out: 78.762,69.816 77.827,70.75 69.915,70.75 67.3,68.45 66.963,68.45 56.15,68.45 56.15,64.725 78.725,64.725

## Silkscreen, mask and mechanical layers (free items; w line width, h text height)
Top Overlay:
  text "-" at 83.675,90.55 h0.7
  text "-" at 42.475,90.475 h0.7
  text "+" at 78.325,90.45 h0.7
  text "+" at 45.05,90.425 h0.7
  text "RX" at 85.975,90.375 h0.7
  text "TX" at 80.65,90.35 h0.7
  text "SPK" at 46.425,90.325 h0.7
  text "LED0-7" at 94.95,88.425 h0.7
  text "UART" at 74.4,88.4 h0.7
  text "+" at 84.05,88.35 h0.7
  text "RST" at 30.4,86.1 h0.7
  text "-" at 27.95,82.35 h0.7
  text "+" at 30.625,82.25 h0.7
  text "-" at 63.375,71.8 h0.7
  text "+" at 66.05,71.725 h0.7
  text "BOOT" at 68.2,70.45 h0.7
  text "MedBox v1.0 / Marcel Lis" at 41.975,70.4 h1
  text "BTN7-5" at 56.6,64.775 h0.7
  text "BTN0-3" at 66.8,64.775 h0.7
  text "GND0-7" at 34.575,64.5 h0.7
Mechanical 1:
  lines w0.254: 25.4,63.499 25.4,91.439 99.667,91.439 99.668,63.499 96.078,63.499 25.4,63.499